# Altium PCB nrf52832_qfax_dcdc.PcbDoc
Units mm, origin at the board's own origin, x right, y up, seen from the top; angles counter-clockwise.
Board outline 76 x 76 mm, 2 copper layers (Top Layer, Bottom Layer), stack 1.671 mm thick; 50 components, 56 nets, 182 pads, 212 vias.
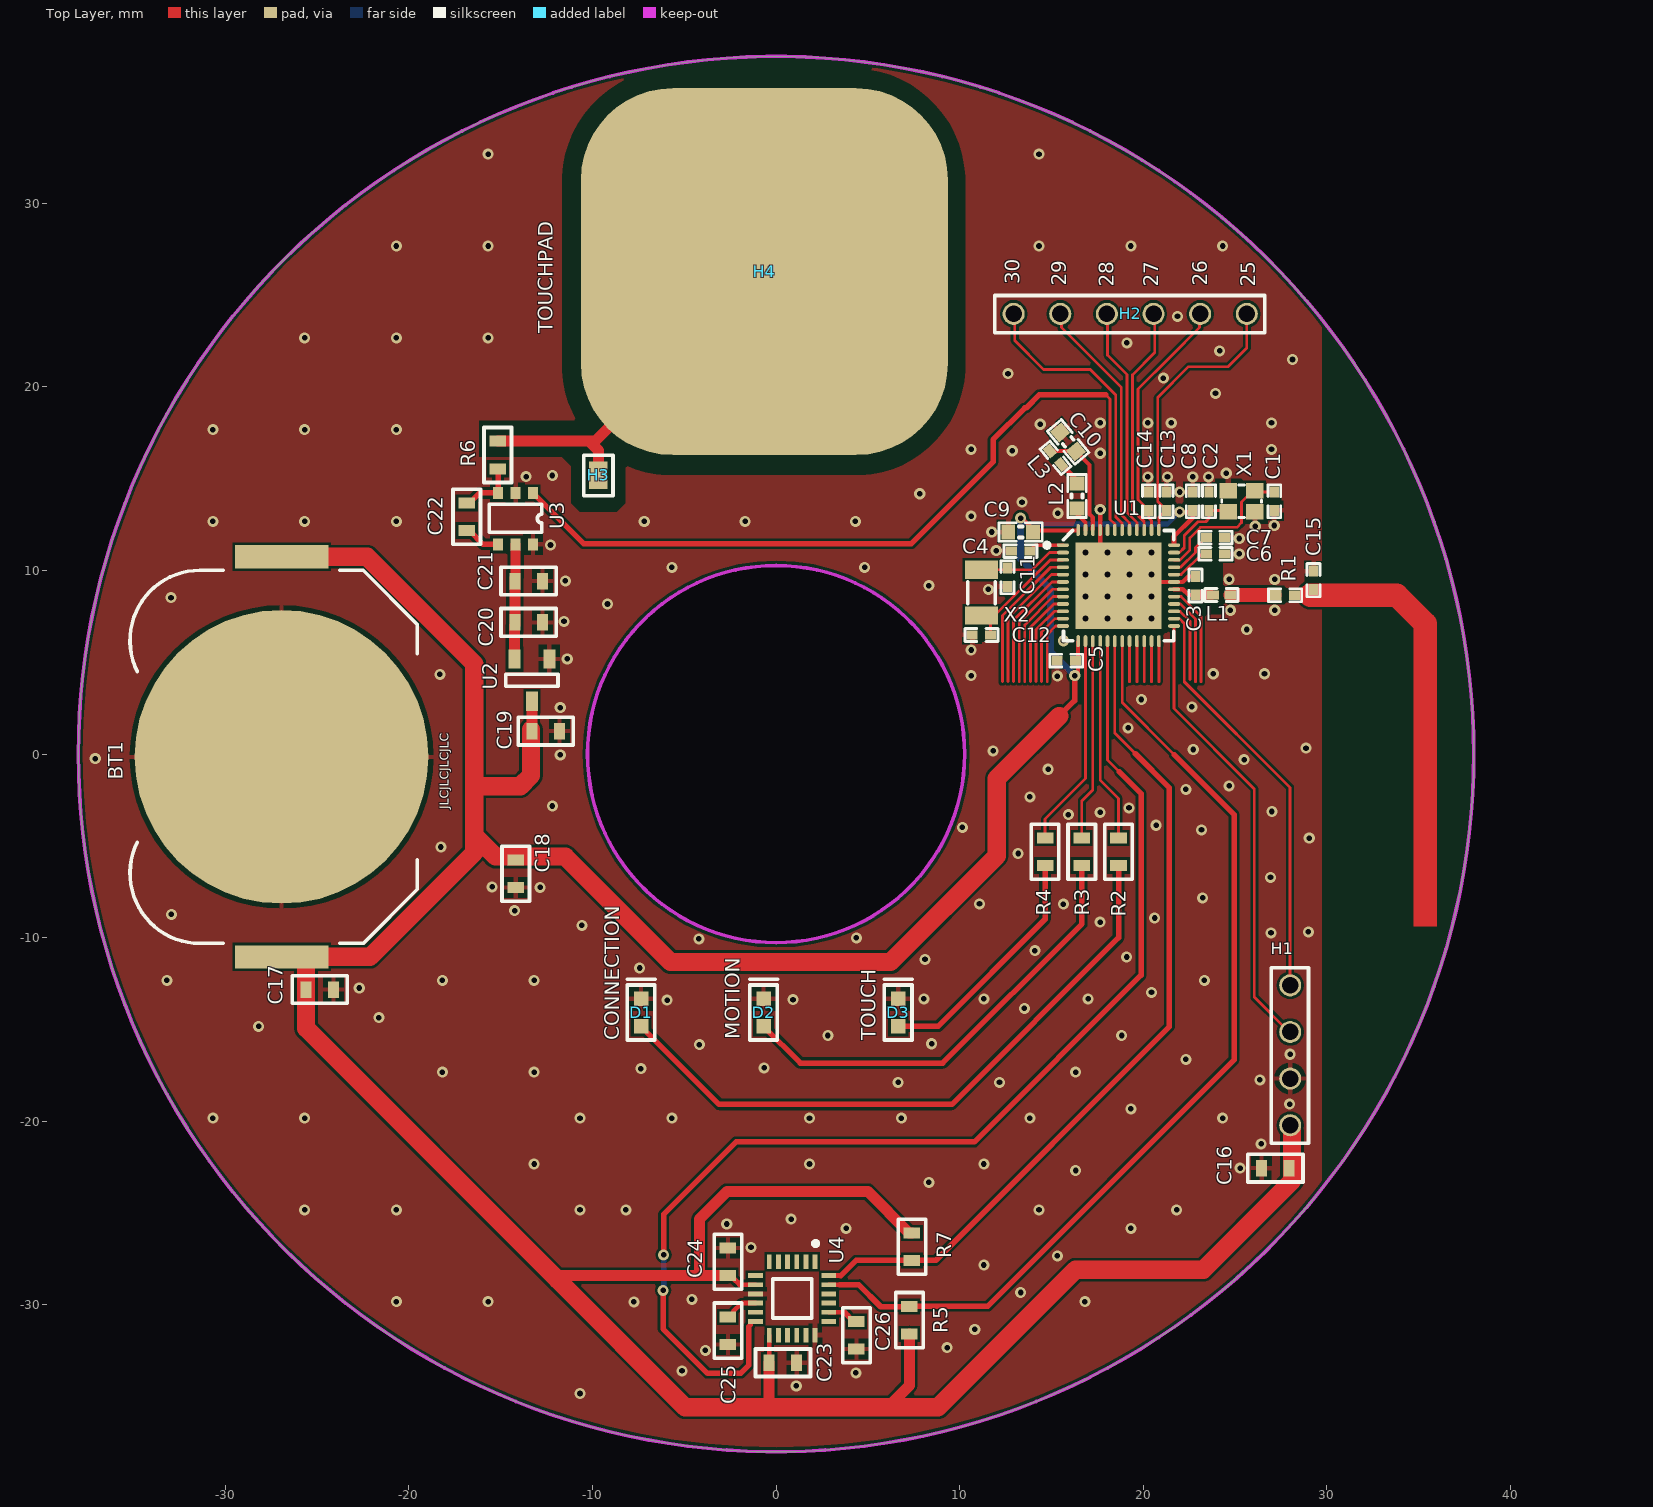
[diagram p0: Top Layer view]
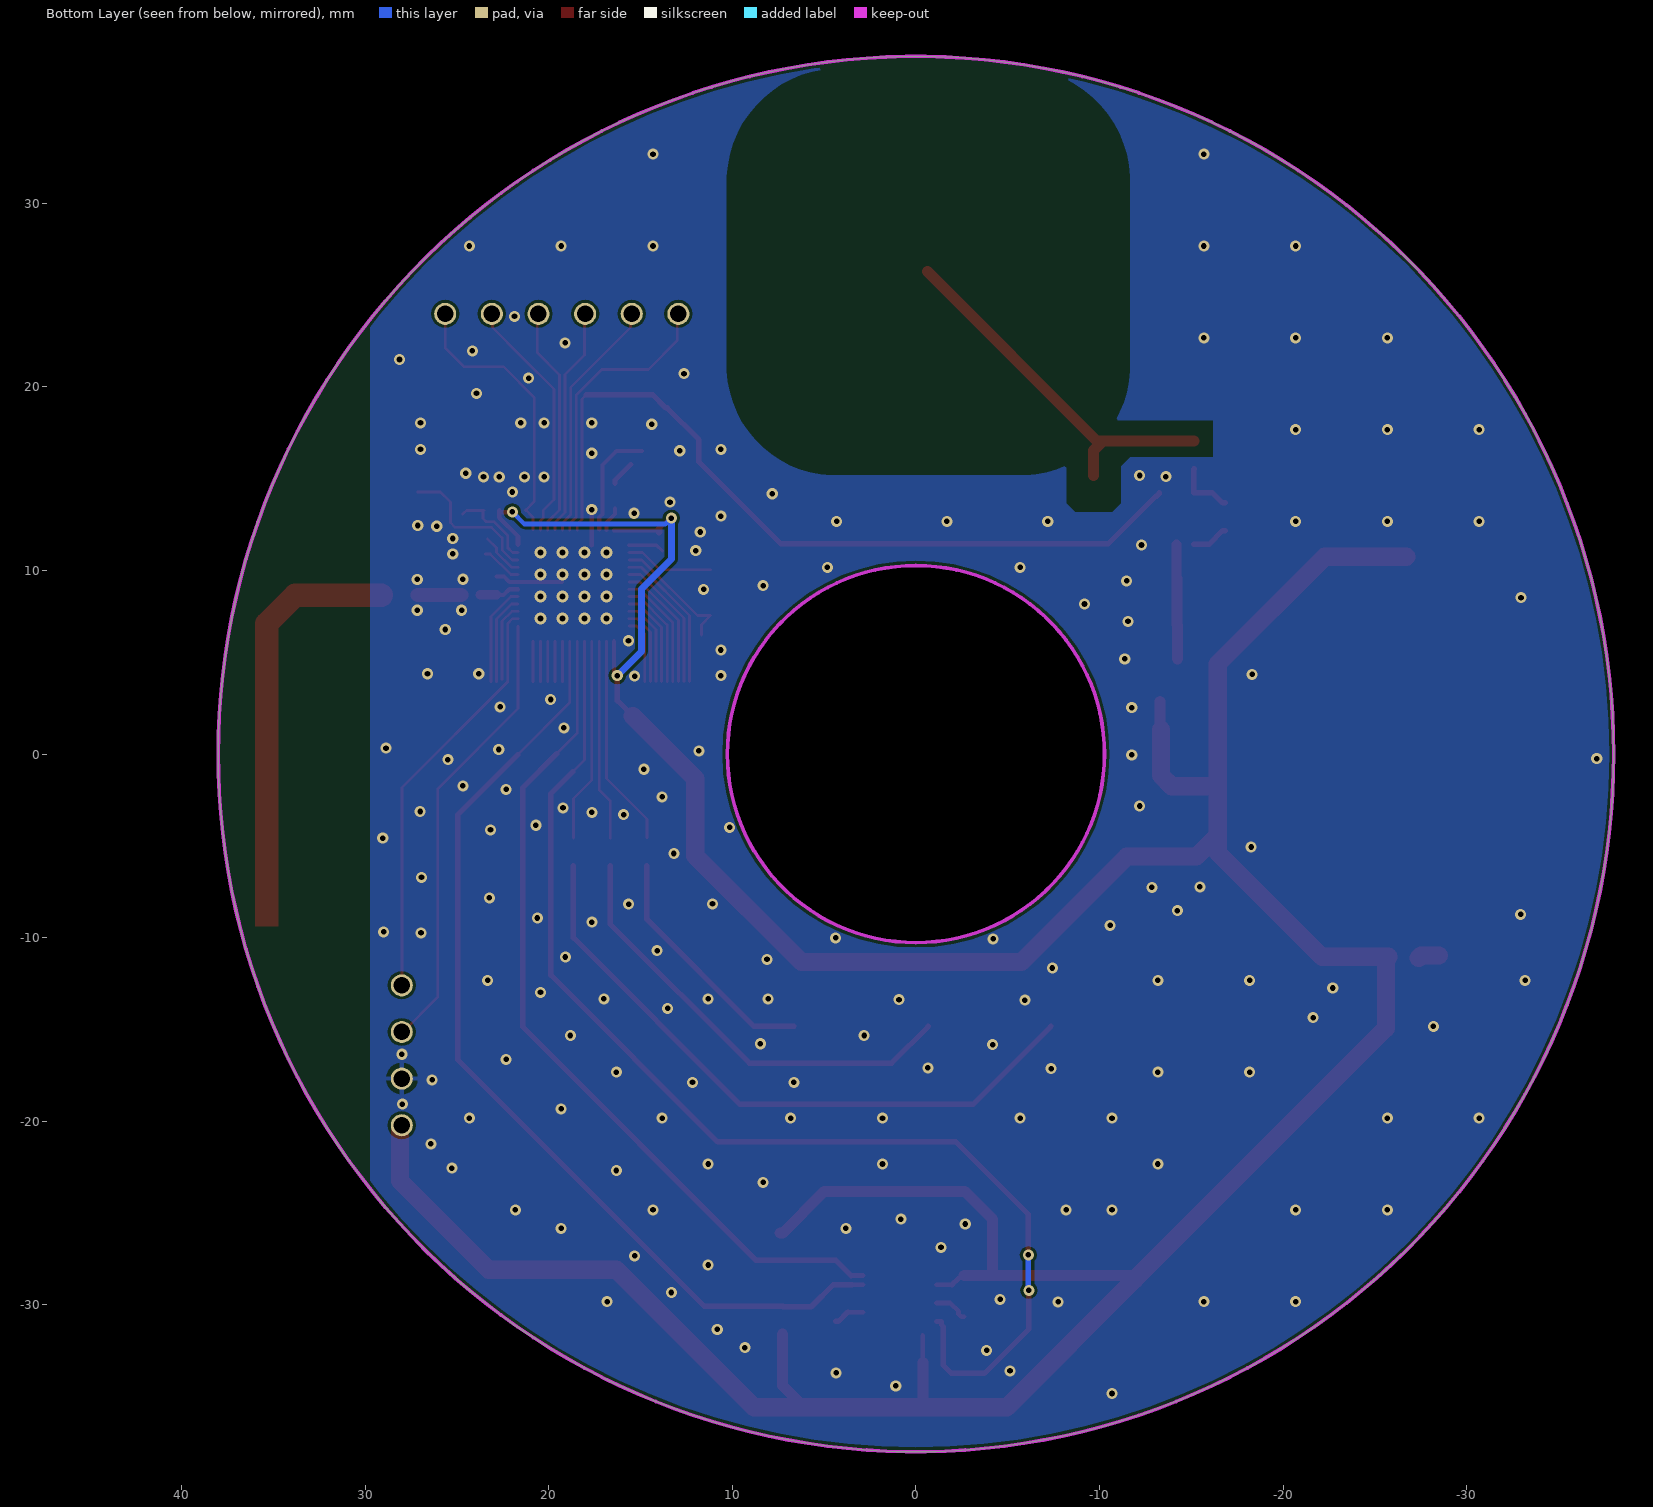
[diagram p1: Bottom Layer view, seen from below]
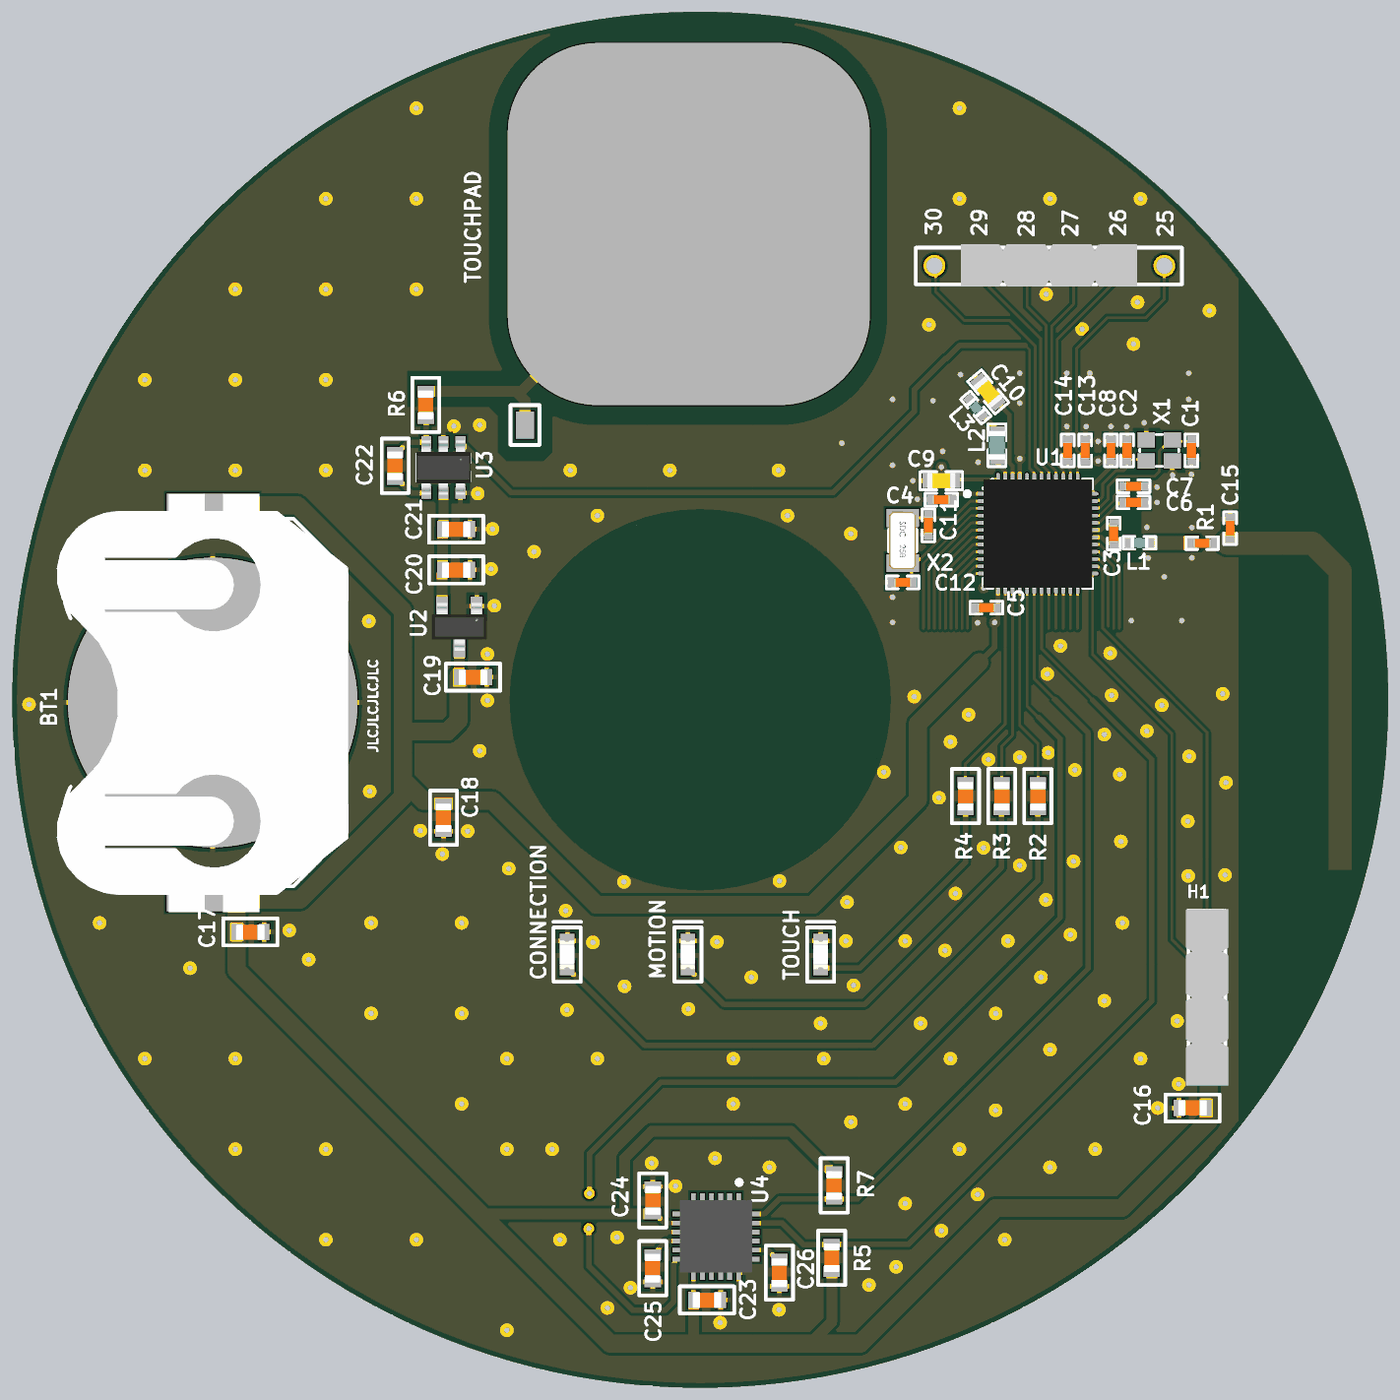
[diagram p2: 3D render of the assembled board from above, using the file's embedded part models]

## Layer stack, top to bottom
Top Solder: solder mask 0.0102, Solder Resist, Dk 3.5
Top Layer: signal copper 0.0356
Dielectric1: core 1.6002, FR-4, Dk 4.8
Bottom Layer: signal copper 0.0356
Bottom Solder: solder mask 0.0102, Solder Resist, Dk 3.5

## Board outline
0,-38 cw(c0,0) -38,0 cw(c0,0) 0,38 cw(c0,0) 38,0 cw(c0,0)
cut-out: 0,-10.269 cw(c0,0) -10.269,0 cw(c0,0) 0,10.269 cw(c0,0) 10.269,0 cw(c0,0)
cut-out: 0,-10.269 cw(c0,0) -10.269,0 cw(c0,0) 0,10.269 cw(c0,0) 10.269,0 cw(c0,0)

## Design rules (kind name [scope] priority, off if disabled: settings)
Clearance Clearance_1 [All] p1 off: gap=0.254 ignorepadtopadclearanceinfootprint=FALSE except(0: Arc-Hole Track-Hole SMDPad-Hole THPad-Hole Via-Hole Fill-Hole Poly-Hole Region-Hole Text-Hole)
Clearance Polygon_ANT [(InNamedPolygon('Top_Layer-GND')) or (InNamedPolygon('Bottom_Layer-GND')) vs InNet('RF')] p2: gap=0.127 ignorepadtopadclearanceinfootprint=FALSE except(0: Arc-Hole Track-Hole SMDPad-Hole THPad-Hole Via-Hole Fill-Hole Poly-Hole Region-Hole Text-Hole)
Clearance Polygon [(InNamedPolygon('Top_Layer-GND')) or (InNamedPolygon('Bottom_Layer-GND'))] p3: gap=0.254 ignorepadtopadclearanceinfootprint=FALSE except(0: Arc-Hole Track-Hole SMDPad-Hole THPad-Hole Via-Hole Fill-Hole Poly-Hole Region-Hole Text-Hole)
Clearance [All] p4: gap=0.152 ignorepadtopadclearanceinfootprint=FALSE except(0: Arc-Hole Track-Hole SMDPad-Hole THPad-Hole Via-Hole Fill-Hole Poly-Hole Region-Hole Text-Hole; 0.127: SMDPad-SMDPad)
ComponentClearance [All] p1 off: gap=0.254 collisioncheckmode=3 verticalgap=0.254 showdistances=FALSE
FabricationTestPointUsage TestPointUsage [All] p1: valid=0 allowmultiple=FALSE
FabricationTestpoint Testpoint [All] p1: side=3 testpointundercomponent=TRUE minsize=1.016 maxsize=2.54 preferedsize=1.524 minholesize=0 maxholesize=1.016 preferedholesize=0.813 testpointgrid=0.025 allowsidetop=TRUE allowsidebottom=TRUE usegrid=TRUE gridtolerance=0
Height [All] p1 off: minheight=0 maxheight=25.4 prefheight=12.7
HoleSize [All] p1: absolutevalues=TRUE maxlimit=4.064 minlimit=0.305 maxpercent=80.000 minpercent=20.000
MinimumAnnularRing [All] p1 off: minimumring=0.152
PolygonConnect PolygonConnect_1 [isVia and innet(gnd)] p1: connectstyle=Direct reliefconductorwidth=0.254 reliefentries=4 polygonreliefangle="90 Angle" airgapwidth=0.254
PolygonConnect [All] p2: connectstyle=Relief reliefconductorwidth=0.254 reliefentries=4 polygonreliefangle="90 Angle" airgapwidth=0.254
RoutingVias [All] p1: holewidth=0.406 width=0.813 viastyle="Through Hole" minholewidth=0.254 minwidth=0.254 maxholewidth=0.711 maxwidth=1.27
SilkToSolderMaskClearance SilkscreenOverComponentPads [IsPad] p1: minsilkscreentomaskgap=0.254 clearancetoexposedcopper=TRUE
SolderMaskExpansion [All] p1: expansion=0.076 istentingtop=FALSE
Width [All] p1: maxlimit=2.54 minlimit=0.152 preferedwidth=0.152
24 further rules are at their usual default settings.

## Classes and differential pairs
component class CurlingStoneSchematic: BT1 C16 C17 C18 C19 C20 C21 C22 C23 C24 C25 C26 D1 D2 D3 H1 H2 H3 H4 R2 R3 R4 R5 R6 R7 U2 U3 U4

## Components (designator, comment, footprint, x,y, rotation, side; value= is the part's Value field where it differs from the comment)
BT1 "Battery Holder" "Battery Holder" -26.93,-0.151 r90 top
C1 "12pF" CAPC1005X04L 27.133,13.773 r270 top
C2 "12pF" CAPC1005X04L 23.577,13.773 r90 top
C3 "0.8pF" CAPC1005X04L 22.841,9.175 r270 top
C4 "100nF" CAPC1005X04L 13.316,11.055 r180 top
C5 "100nF" CAPC1005X04L 15.805,5.086 r180 top
C6 "N.C." CAPC1005X04L 23.933,10.902 r180 top
C7 "100pF" CAPC1005X04L 23.933,11.791 r0 top
C8 "100nF" CAPC1005X04L 22.688,13.773 r90 top
C9 "4.7µF" CAPC1608X06L 13.316,12.096 r180 top
C10 "1.0µF" CAPC1608X06L 15.908,17.003 r310 top
C11 "12pF" CAPC1005X04L 12.605,9.632 r270 top
C12 "12pF" CAPC1005X04L 11.182,6.483 r180 top
C13 "12pF" CAPC1005X04L 21.266,13.773 r90 top
C14 "12pF" CAPC1005X04L 20.301,13.773 r90 top
C15 "0603 Capacitor" RF_0603 29.27,9.474 r270 top
C16 "0603 Capacitor" 0603 27.195,-22.551 r0 top
C17 "0603 Capacitor" 0603 -24.85,-12.825 r180 top
C18 "0603 Capacitor" 0603 -14.18,-6.515 r90 top
C19 "0603 Capacitor" 0603 -12.55,1.249 r180 top
C20 "0603 Capacitor" 0603 -13.48,7.175 r180 top
C21 "0603 Capacitor" 0603 -13.48,9.424 r180 top
C22 "0603 Capacitor" 0603 -16.85,12.925 r90 top
C23 "0603 Capacitor" 0603 0.375,-33.15 r180 top
C24 "0603 Capacitor" 0603 -2.625,-27.65 r270 top
C25 "0603 Capacitor" 0603 -2.625,-31.4 r90 top
C26 "0603 Capacitor" 0603 4.375,-31.65 r90 top
D1 "0603 LED" "0603 LED" -7.35,-14.076 r90 top
D2 "0603 LED" "0603 LED" -0.68,-14.076 r90 top
D3 "0603 LED" "0603 LED" 6.65,-14.076 r90 top
H1 "4x1 Header" "4x1 HEADER TH" 28,-20.215 r90 top
H2 "6x1 Header" "6x1 HEADER TH" 25.636,23.974 r180 top
H3 "Electrode" "ELECTRODE EXTERNAL" -9.68,15.174 r0 top
H4 "Electrode" "ELECTRODE INTERNAL" -0.635,26.277 r0 top
L1 "3.9nH" INDC1005X04L 24.263,8.667 r0 top
L2 "10µH" INDC1608X06L 16.389,14.057 r270 top
L3 "15nH" INDC1005X04L 15.222,16.14 r310 top
R1 "0603 Resistor" RF_0603 27.725,8.65 r0 top
R2 "0603 Resistor" 0603 18.649,-5.325 r270 top
R3 "0603 Resistor" 0603 16.65,-5.325 r270 top
R4 "0603 Resistor" 0603 14.65,-5.325 r270 top
R5 "0603 Resistor" 0603 7.261,-30.826 r270 top
R6 "0603 Resistor" 0603 -15.158,16.289 r90 top
R7 "0603 Resistor" 0603 7.4,-26.826 r90 top
U1 "nRF52832-QFAB" QFN40P600X600X90-48N 18.65,9.175 r0 top locked
U2 "MCP1700 1V8" "MCP1700 SOT-23" -12.35,5.175 r270 top
U3 "Capacative Touch" "CAPACATIVE TOUCH" -13.24,14.225 r270 top
U4 "MPU-6050" MPU-6050 2.125,-27.65 r270 top
X1 "32MHz" BT-XTAL_2016 25.355,13.773 r180 top
X2 "32.768kHz" XTAL_3215 11.182,8.794 r270 top

## Footprints (in the part's own frame and the unit in brackets; to place one, negate y for a bottom-side part, rotate by r counter-clockwise, add the part's x,y. Pads: shape width x height; smd on the part's side, far side on the other; paste and mask are expansions set on the pad)
"4x1 HEADER TH" [mm]
  round 1.2 hole 0.9: 1(0,0) 2(2.54,0) 3(5.08,0) 4(7.62,0)
  silkscreen extent -0.97,-1 8.57,1.02, body extent -1.1,-1.17 8.65,1.17, height 10.38
"6x1 HEADER TH" [mm]
  round 1.2 hole 0.9: 1(0,0) 2(2.54,0) 3(5.08,0) 4(7.62,0) 5(10.16,0) 6(12.7,0)
  silkscreen extent -0.97,-1 13.72,1.02, body extent 1.5,-1.19 11.25,1.14, height 10.38
0603 [mm]
  rect 0.6x0.9 smd: 1(-0.75,0) 2(0.75,0)
  silkscreen extent -1.5,-0.75 1.5,0.75, body extent -0.8,-0.42 0.8,0.45, height 0.81
"0603 LED" [mm]
  rect 0.8x0.8 smd: 1(-0.75,0) 2(0.75,0)
  silkscreen extent -1.5,-0.76 1.8,0.76, body extent -0.8,-0.4 0.8,0.4, height 0.56
"Battery Holder" [mm]
  rect 1.27x5.08 smd: 1(-10.897,0) 1(10.897,0)
  round 16 smd: 2(0,0)
  silkscreen extent -10.16,-7.39 10.16,8.25, body extent -11.57,-7.47 11.53,8.62, height 4.1
BT-XTAL_2016 [mm] "Crystal 2.0 x 1.6 mm"
  rect 0.95x0.85 smd: 1(-0.725,-0.575) 2(0.725,-0.575) 3(0.725,0.575) 4(-0.725,0.575)
  silkscreen extent -1.08,-0.88 1.08,0.88
"CAPACATIVE TOUCH" [mm]
  rect 0.65x0.55 smd: 1(0,0) 2(0,-0.95) 3(0,-1.9) 4(2.8,-1.9) 5(2.8,-0.95) 6(2.8,0)
  silkscreen extent 0.63,-2.38 2.15,0.48, body extent -0.1,-2.45 2.9,0.55, height 1.48
CAPC1005X04L [mm] "Chip Capacitor, 2-Leads, Body 1.0x0.5mm, IPC High Density"
  rect 0.6x0.5 smd: 1(-0.5,0) 2(0.5,0)
  silkscreen extent -0.9,-0.35 0.9,0.35, body extent -0.51,-0.25 0.51,0.25, height 0.5
CAPC1608X06L [mm] "Chip Capacitor, 2-Leads, Body 1.6x0.8mm, IPC High Density"
  rect 0.75x0.8 smd: 1(-0.675,0) 2(0.675,0)
  silkscreen extent -1.17,-0.5 1.17,0.5, body extent -0.8,-0.43 0.8,0.43, height 0.8
"ELECTRODE EXTERNAL" [mm]
  rect 1x1.5 smd: 1(0,0)
  silkscreen extent -0.8,-1.1 0.8,1.1
"ELECTRODE INTERNAL" [mm]
  rrect50% 20x20 smd: 1(0,0)
INDC1005X04L [mm] "Chip Inductor, 2-Leads, Body 1.0x0.5mm, IPC High Density"
  rect 0.65x0.5 smd: 1(-0.475,0) 2(0.475,0)
  silkscreen extent -0.9,-0.35 0.9,0.35, body extent -0.5,-0.3 0.5,0.3, height 0.5
INDC1608X06L [mm] "Chip Inductor, 2-Leads, Body 1.6x0.8mm, IPC High Density"
  rect 0.75x0.8 smd: 1(-0.675,0) 2(0.675,0)
  silkscreen extent -1.18,-0.5 1.17,0.5, body extent -0.8,-0.48 0.8,0.48, height 0.8
"MCP1700 SOT-23" [mm]
  rect 1.05x0.65 smd: 1(0,0) 2(0,-1.9) 3(2.3,-0.95)
  silkscreen extent 0.82,-2.38 1.48,0.48, body extent -0.17,-2.47 2.47,0.57, height 1.12
MPU-6050 [mm]
  rect 0.8x0.26 smd: 1(0,0) 2(0,-0.5) 3(0,-1) 4(0,-1.5) 5(0,-2) 6(0,-2.5) 13(4,-2.5) 14(4,-2) 15(4,-1.5) 16(4,-1) 17(4,-0.5) 18(4,0)
  rect 0.26x0.8 smd: 7(0.75,-3.25) 8(1.25,-3.25) 9(1.75,-3.25) 10(2.25,-3.25) 11(2.75,-3.25) 12(3.25,-3.25) 19(3.25,0.75) 20(2.75,0.75) 21(2.25,0.75) 22(1.75,0.75) 23(1.25,0.75) 24(0.75,0.75)
  silkscreen extent -1.14,-2.31 3.06,0.18, body extent 0,-3.25 4,0.75, height 0.94
QFN40P600X600X90-48N [mm] "QFN, 48-Leads, Body 6,0x6,0mm (max), Pitch 0,40mm, IPC Medium Density"
  oval 0.65x0.2 smd: 1(-3.025,2.2) 2(-3.025,1.8) 3(-3.025,1.4) 4(-3.025,1) 5(-3.025,0.6) 6(-3.025,0.2) 7(-3.025,-0.2) 8(-3.025,-0.6) 9(-3.025,-1) 10(-3.025,-1.4) 11(-3.025,-1.8) 12(-3.025,-2.2) 25(3.025,-2.2) 26(3.025,-1.8) 27(3.025,-1.4) 28(3.025,-1) 29(3.025,-0.6) 30(3.025,-0.2) 31(3.025,0.2) 32(3.025,0.6) 33(3.025,1) 34(3.025,1.4) 35(3.025,1.8) 36(3.025,2.2)
  oval 0.2x0.65 smd: 13(-2.2,-3.025) 14(-1.8,-3.025) 15(-1.4,-3.025) 16(-1,-3.025) 17(-0.6,-3.025) 18(-0.2,-3.025) 19(0.2,-3.025) 20(0.6,-3.025) 21(1,-3.025) 22(1.4,-3.025) 23(1.8,-3.025) 24(2.2,-3.025) 37(2.2,3.025) 38(1.8,3.025) 39(1.4,3.025) 40(1,3.025) 41(0.6,3.025) 42(0.2,3.025) 43(-0.2,3.025) 44(-0.6,3.025) 45(-1,3.025) 46(-1.4,3.025) 47(-1.8,3.025) 48(-2.2,3.025)
  rect 4.7x4.7 smd: 49(0,0)
  silkscreen extent -4.02,-3 3,3, body extent -3.02,-3.02 3.02,3.02, height 0.86
RF_0603 [mm]
  rect 0.6x0.5 smd: 1(-0.5,0) 2(0.5,0)
  silkscreen extent -0.9,-0.35 0.9,0.35, body extent -0.51,-0.25 0.51,0.25, height 0.5
XTAL_3215 [mm] "XTAL SMD 3.2 x 1.5 mm"
  rect 1x1.8 smd: 1(-1.25,0) 2(1.25,0)
  silkscreen extent -0.6,-0.75 0.6,0.75, body extent -1.6,-0.75 1.6,0.75, height 0.81

## Part data
BT1: "Battery Holder 1-Cell 20mm Size Tin Nickel SMT Mount T/R", Case/Package=SMD/SMT, Manufacturer 1="Keystone Electronics", Manufacturer Part Number 1=3034TR, Package Quantity=500, Supplier Part Number 1=36-3034CT-ND, Category=Uncategorized, ComponentLink1Description=https://datasheet.ciiva.com/29204/3034tr-29204080.pdf?src-supplier=Digi-Key, ComponentLink1URL=https://datasheet.ciiva.com/29204/3034tr-29204080.pdf?src-supplier=Digi-Key, ComponentLink2Description=https://datasheet.ciiva.com/41797/3034-41797079.pdf?src-supplier=Digi-Key, ComponentLink2URL=https://datasheet.ciiva.com/41797/3034-41797079.pdf?src-supplier=Digi-Key, Contact Plating=Tin, Lead Free="Lead Free", Material=Bronze, Mount="Surface Mount,PCB", Number of Batteries=1, Number of Cells=1, Packaging="Tape and Reel", Pricing 1="1=0.42000, 25=0.37760, 100=0.28630, 250=0.25592 (USD)", RoHS=Yes, Stock 1=74655, Supplier 1=Digi-Key, Termination=SMD/SMT
C1 C2 C11 C12 C13 C14: library part C0402-12p, "Capacitor, NP0, ±2%", Artikkelnr Noca=20029159, Artikkelnr Simpro=N.A., Footprint Doc=0402, LatestRevisionDate=2011-05-11, Note=50V, Part Number=C0402-12p, Pin Count=2, Published=2009-05-08, Publisher="Nordic Semiconductor"
C3: library part C0402-0.8p, "Capacitor, NP0, ±5%", Artikkelnr Noca=20029147, Artikkelnr Simpro=N.A., Footprint Doc=0402, LatestRevisionDate=2012-11-21, Note=50V, Part Number=C0402-0.8p, Pin Count=2, Published=2009-05-08, Publisher="Nordic Semiconductor"
C4 C5 C8: library part C0402-100n, "Capacitor, X7R, ±10%", Artikkelnr Noca=20039200, Artikkelnr Simpro=N.A., Footprint Doc=0402, LatestRevisionDate=2009-11-23, Note=16V, Part Number=C0402-100n, Pin Count=2, Published=2009-05-08, Publisher="Nordic Semiconductor"
C6: library part C0402-N.C., "Not mounted", Artikkelnr Noca=N.A., Artikkelnr Simpro=N.A., Footprint Doc=0402, LatestRevisionDate=2009-05-08, Note="Chip Cap", Part Number=C0402-N.C., Pin Count=2, Published=2009-05-08, Publisher="Nordic Semiconductor"
C7: library part C0402-100p, "Capacitor, NP0, ±5%", Artikkelnr Noca=20029135, Artikkelnr Simpro=N.A., Footprint Doc=0402, LatestRevisionDate=2009-05-08, Note=50V, Part Number=C0402-100p, Pin Count=2, Published=2009-05-08, Publisher="Nordic Semiconductor"
C9: library part C0603-4µ7, "Capacitor, X5R, ±10%", Artikkelnr Noca=20069060, Artikkelnr Simpro=N.A., Footprint Doc=0603, LatestRevisionDate=2009-11-23, Note=6.3V, Part Number=C0603-4µ7, Pin Count=2, Published=2009-05-08, Publisher="Nordic Semiconductor"
C10: library part C0603-1µ0, "Capacitor, X7R, ±10%", Artikkelnr Noca=20039335, Artikkelnr Simpro=N.A., Footprint Doc=0603, LatestRevisionDate=2013-06-05, Note=16V, Part Number=C0603-1µ0, Pin Count=2, Published=2009-05-08, Publisher="Nordic Semiconductor"
D1 D2 D3: "LED Uni-Color Green 574nm 2-Pin Chip LED T/R", Case Code (Imperial)=0603, Case Code (Metric)=1608, Color=Green, Forward Current=30mA, Forward Voltage=2V, Lens Color=Colorless, Manufacturer 1="Vishay Lite-On", Manufacturer Part Number 1=LTST-C191KGKT, Max Operating Temperature=85°C, Max Power Dissipation=75mW, Min Operating Temperature=-55°C, Package Quantity=1, Reverse Voltage=5V, Supplier Part Number 1=160-1446-1-ND, Test Current=20mA, Case/Package=0603, Category=LEDs, ComponentLink1Description=https://datasheet.ciiva.com/2109/ltst-c191kgkt-2109973.pdf?src-supplier=Digi-Key, ComponentLink1URL=https://datasheet.ciiva.com/2109/ltst-c191kgkt-2109973.pdf?src-supplier=Digi-Key, Depth=0.8mm, Dominant Wavelength=571nm, Height=0.55mm, Illumination Color=Green, Lead Free="Lead Free", Length=1.6mm, Lens Style=Rectangular,Colorless, Lens Transparency=Clear, Luminous Intensity=35mcd, Mount="Surface Mount", Number of Elements=1, Number of LEDs=1, Number of Pins=2, Packaging="Tape and Reel", Power Dissipation=75mW, Power Rating=75mW, Pricing 1="1=0.26000, 10=0.14100, 100=0.06560, 500=0.06060, 1000=0.04747, 2000=0.04646 (USD)", Radiation Hardening=No, RoHS=Yes, RoHS Compliant=Yes, Supplier 1=Digi-Key, Viewing Angle=130°, Wavelength=574nm, Width=0.8mm
L1: library part L0402-3n9, "High frequency chip inductor ±5%", Manufacturer=Murata, Manufacturer Part Number=LQP15MN3N9B02D, Supplier part number=490-1131-1-ND, Artikkelnr Noca=33029151, Artikkelnr Simpro=N.A., Datasheet=http://search.murata.co.jp/Ceramy/image/img/PDF/ENG/L0075S0084LQP15M.pdf, Footprint Doc=0402, LatestRevisionDate=2012-09-19, Note="High frequency chip inductor ±5%", Part Number=L0402-3n9, Pin Count=2, Published=2009-05-08, Publisher="Nordic Semiconductor", Supplier=Digi-Key
L2: library part L0603-10µ, "Chip inductor, IDC,min = 50 mA, ±20%", 2nd source part number=178-6105, Manufacturer="Taiyo Yuden", Manufacturer Part Number=LBMF1608T100K, Supplier part number=587-1714-1-ND, 2nd source Supplier=Farnell, Artikkelnr Noca=33029314, Artikkelnr Simpro=N.A., Datasheet=http://www.yuden.co.jp/ut/product/pdf/elb2_e.pdf, Footprint Doc=0603, LatestRevisionDate=2012-09-19, Note="LBMF1608T100K 10µH 80mA 0603", Part Number=L0603-10µ, Pin Count=2, Published=2010-02-24, Publisher="Nordic Semiconductor", Supplier=Digi-Key
L3: library part L0402-15n, "High frequency chip inductor ±10%", 2nd source part number=658-1328, Manufacturer="Taiyo Yuden", Manufacturer Part Number=HK100515NJ-T, Supplier part number=587-1521-1-ND, 2nd source Supplier=Farnell, Artikkelnr Noca=33029323, Artikkelnr Simpro=N.A., Datasheet=http://www.yuden.co.jp/productdata/catalog/en/mlci04_e.pdf, Footprint Doc=0402, LatestRevisionDate=2012-09-19, Note="High frequency chip inductor ±10%", Part Number=L0402-15n, Pin Count=2, Published=2010-07-12, Publisher="Nordic Semiconductor", Supplier=Digi-Key
U1: "Multi-protocol Bluetooth Low Energy, ANT and 2.4GHz proprietary system-on-chip", Manufacturer="Nordic Semiconductor", Artikkelnr Noca=N.A., Artikkelnr Simpro=N.A., Footprint Doc=QFN-48, LatestRevisionDate=2016-11-24, Manufacturer Part Number=nRF52832-QFAB, Part Number=nRF52832-QFAB, Pin Count=48, Published=2016-11-24, Publisher="Nordic Semiconductor", Supplier="Nordic Semiconductor"
U2: "V REG, LDO 250MA, SMD, SOT-23-3; Output Voltage:1.8V; Dropout voltage:0.178V; No. of Pins:3; Voltage Regulator IC Case Style:SOT-23; Operating Temperature Range:-40°C to +125°C; Case Style:SOT-23; Max Operating Temperature:125°C; Min;RoHS Compliant: Yes", Case/Package=SOT-23, Dropout Voltage=150mV, Input Bias Current=1.6uA, Manufacturer 1=Microchip, Manufacturer Part Number 1=MCP1700T-1802E/TT, Max Input Voltage=6V, Max Operating Temperature=125°C, Max Output Current=250mA, Max Output Voltage=1.8V, Max Power Dissipation=369.6mW, Min Input Voltage=2.3V, Min Operating Temperature=-40°C, Nominal Supply Current=4uA, Output Voltage Accuracy=2%, Package Quantity=3000, Supplier Part Number 1=MCP1700T1802ETTCT-ND, Accuracy=2%, Category="Voltage Regulators - Linear", ComponentLink1Description=https://datasheet.ciiva.com/14150/mcp1700-eng-tds-14150117.pdf?src-supplier=Distrelec, ComponentLink1URL=https://datasheet.ciiva.com/14150/mcp1700-eng-tds-14150117.pdf?src-supplier=Distrelec, ComponentLink2Description=https://datasheet.ciiva.com/17364/jp011779-17364282.pdf?src-supplier=Avnet+Europe, ComponentLink2URL=https://datasheet.ciiva.com/17364/jp011779-17364282.pdf?src-supplier=Avnet+Europe, ComponentLink3Description=https://datasheet.ciiva.com/2040/21826b-2040109.pdf?src-supplier=Digi-Key, ComponentLink3URL=https://datasheet.ciiva.com/2040/21826b-2040109.pdf?src-supplier=Digi-Key, ComponentLink4Description=https://datasheet.ciiva.com/8041/21826b-8041597.pdf?src-supplier=Element14, ComponentLink4URL=https://datasheet.ciiva.com/8041/21826b-8041597.pdf?src-supplier=Element14, ComponentLink5Description=https://datasheet.ciiva.com/2040/21826b-2040110.pdf?src-supplier=Digi-Key, ComponentLink5URL=https://datasheet.ciiva.com/2040/21826b-2040110.pdf?src-supplier=Digi-Key, ComponentLink6Description=https://datasheet.ciiva.com/8237/jp011779-8237326.pdf?src-supplier=Avnet, ComponentLink6URL=https://datasheet.ciiva.com/8237/jp011779-8237326.pdf?src-supplier=Avnet, ComponentLink7Description=https://datasheet.ciiva.com/16218/filehandler-aspxddocname-en011779-16218350.pdf?src-supplier=Future+Electronics, ComponentLink7URL=https://datasheet.ciiva.com/16218/filehandler-aspxddocname-en011779-16218350.pdf?src-supplier=Future+Electronics, Height=0.95mm, Lead Free="Lead Free", Length=2.9mm, Max Supply Voltage=6V, Min Output Voltage=1.8V, Min Supply Voltage=2.3V, Mount="Surface Mount", Nominal Output Voltage=1.8V, Number of Outputs=1, Number of Pins=3, Output Current=250mA, Output Type=Fixed, Output Voltage=1.8V, Packaging="Tape and Reel", Polarity=Positive, Power Dissipation=369.6mW, Pricing 1="1=0.39000, 25=0.33000, 100=0.29000 (USD)", Quiescent Current=4uA, Radiation Hardening=No, REACH SVHC="No SVHC", RoHS=Yes, RoHS Compliant=Yes, Stock 1=24907, Supplier 1=Digi-Key, Supply Current=4uA, Termination=SMD/SMT, Width=1.3mm
U3: "Capacitive Touch Screen 1Keys 6-Pin SOT-23 Tape and Reel", Case/Package=SOT-23-6, Load Capacitance=50pF, Manufacturer 1="Microchip / Atmel", Manufacturer Part Number 1=AT42QT1011-TSHR, Max Operating Temperature=85°C, Max Supply Voltage=5.5V, Min Operating Temperature=-40°C, Min Supply Voltage=1.8V, Nominal Supply Current=729uA, Operating Supply Current=378.5uA, Package Quantity=4500, Supplier Part Number 1=AT42QT1011-TSHRCT-ND, Category=Uncategorized, ComponentLink1Description=https://datasheet.ciiva.com/1165/731627-1165685.pdf?src-supplier=Element14, ComponentLink1URL=https://datasheet.ciiva.com/1165/731627-1165685.pdf?src-supplier=Element14, ComponentLink2Description=https://datasheet.ciiva.com/14094/at42qt1011-eng-tds-14094872.pdf?src-supplier=Distrelec, ComponentLink2URL=https://datasheet.ciiva.com/14094/at42qt1011-eng-tds-14094872.pdf?src-supplier=Distrelec, ComponentLink3Description=https://datasheet.ciiva.com/1403/doc8287-1403456.pdf?src-supplier=Digi-Key, ComponentLink3URL=https://datasheet.ciiva.com/1403/doc8287-1403456.pdf?src-supplier=Digi-Key, ComponentLink4Description=https://datasheet.ciiva.com/1403/doc8287-1403457.pdf?src-supplier=Digi-Key, ComponentLink4URL=https://datasheet.ciiva.com/1403/doc8287-1403457.pdf?src-supplier=Digi-Key, ComponentLink5Description=https://datasheet.ciiva.com/1403/doc8287-1403458.pdf?src-supplier=Digi-Key, ComponentLink5URL=https://datasheet.ciiva.com/1403/doc8287-1403458.pdf?src-supplier=Digi-Key, ComponentLink6Description=https://datasheet.ciiva.com/15222/getdatasheetpartid-463081-15222284.pdf?src-supplier=Verical, ComponentLink6URL=https://datasheet.ciiva.com/15222/getdatasheetpartid-463081-15222284.pdf?src-supplier=Verical, Height=1.3mm, Lead Free="Lead Free", Length=3mm, Mount="Surface Mount", Number of Channels=1, Number of Inputs=1, Number of Pins=6, Packaging="Tape and Reel", Pricing 1="1=0.61000, 25=0.56000, 100=0.50000 (USD)", REACH SVHC="No SVHC", Resolution=14b, RoHS=Yes, RoHS Compliant=Yes, Series=QTouch™, Supplier 1=Digi-Key, Supply Current=729uA, Touchscreen=Capacitive, Width=1.75mm
U4: "INVENSENSE   MPU-6050   GYRO / ACCEL, 6-AXIS, I2C, QFN-24", Case/Package=QFN, Manufacturer 1="TDK InvenSense", Max Operating Temperature=85°C, Min Operating Temperature=-40°C, Supplier Part Number 1=1428-1007-1-ND, Category="Inertial Measurement Units (IMUs)", ComponentLink1Description=https://datasheet.ciiva.com/1513/1788002-1513632.pdf?src-supplier=Element14, ComponentLink1URL=https://datasheet.ciiva.com/1513/1788002-1513632.pdf?src-supplier=Element14, ComponentLink2Description=https://datasheet.ciiva.com/22731/1788002-22731434.pdf?src-supplier=Element14, ComponentLink2URL=https://datasheet.ciiva.com/22731/1788002-22731434.pdf?src-supplier=Element14, Manufacturer Part Number 1=MPU-6050, Mount="Surface Mount", Output Type=I2C, Packaging="Tape and Reel", Pricing 1="1=7.55000, 5=6.62400, 10=5.96200, 25=5.30000, 50=4.90240, 100=4.24000, 500=3.97500, 1000=3.71000 (USD)", RoHS=Yes, RoHS Compliant=Yes, Sensor Type="Accelerometer,Gyroscope,3 Axis", Series=-, Stock 1=3318, Supplier 1=Digi-Key
X1: library part XTAL_SMD2016_32MHz_8pF_General, "XTAL SMD 2016, 32MHz, Cl=8pF, Total Tol: ±40ppm", Artikkelnr Noca=N.A., Artikkelnr Simpro=N.A., Footprint Doc=XTAL_2016, LatestRevisionDate=2016-08-19, Note="XTAL SMD 32.000MHz", Part Number=XTAL_SMD2016_32MHz_8pF_General, Pin Count=4, Published=2016-08-19, Publisher="Nordic Semiconductor"
X2: library part XTAL_SMD3215_32.768kHz_9pF_General, "XTAL SMD 3215, 32.768kHz, Cl=9pF, Total Tol: ±50ppm", Artikkelnr Noca=N.A., Artikkelnr Simpro=N.A., Footprint Doc=XTAL_3215, LatestRevisionDate=2016-08-19, Note="XTAL SMD 32.768kHz", Part Number=XTAL_SMD3215_32.768kHz_9pF_General, Pin Count=2, Published=2016-08-19, Publisher="Nordic Semiconductor"

## Free pads (board coordinates)
  rect 0.762x0.762 smd: 0(27.159,8.673)

## Via types
v1: diameter 0.6, hole 0.305, Top Layer to Bottom Layer, 155 vias
v2: diameter 0.61, hole 0.305, Top Layer to Bottom Layer, tented both sides, 41 vias
v3: diameter 0.66, hole 0.33, Top Layer to Bottom Layer, tented both sides, 16 vias

## Nets (pads, with @x,y where several pads share a name; then routed paths per layer and width w, separated by ;. In a path a pad name is that pad's centre, name@x,y a point inside that pad or via, vN(x,y) a via of type N, cw(c..) or ccw(c..) an arc to the next point about the centre after c; other vN are vias at no path point)
1V8: C20.2 C21.2 U2.2 U3.5 | length 6.3
  Top Layer w0.55: C21.2 -14.23,9.574 -14.19,9.614 U3.5
  Top Layer w0.6: U2.2 -14.25,7.005 -14.23,7.025 C20.2 C21.2@-14.23,9.487
ANT: C15.2 R1.2 | length 22.7
  Top Layer w1.27: 29.106,8.655 33.795,8.655 35.355,7.095 35.355,-8.746
"CHARGE PUMP": C26.2 U4.20 | length 1.7
  Top Layer w0.26: U4.20 3.725,-30.4
  Top Layer w0.3: 3.725,-30.4 3.901,-30.576 4.225,-30.9 C26.2
DEC1: C4.1 U1.1 | length 1.9
  Top Layer w0.203: C4.1@13.82,11.074 14.121,11.375 U1.1
DEC2: C6.2 U1.32 | length 2.2
  Top Layer w0.152: U1.32 22.061,9.775 23.188,10.902 C6.2@23.451,10.902
DEC3: C7.1 U1.33 | length 2.4
  Top Layer w0.152: U1.33 22.03,10.175 22.841,10.986 22.841,11.237 C7.1@23.325,11.721
DEC4: C10.2 L3.1 U1.46 | length 6
  Top Layer w0.229: L3.1 C10.2@16.324,16.504 ; C10.2 17.075,15.752 17.075,13.066 17.25,12.892 U1.46@17.25,12.231
GND: BT1.2 C1.2 C2.2 C3.1 C4.2 C5.2 C6.1 C7.2 C8.2 C9.2 C10.1 C11.2 C12.2 C13.2 C14.2 C15.1 C16.1 C17.1 C18.1 C19.1 C20.1 C21.1 C23.1 C24.1 C25.1 C26.1 D1.2 D2.2 D3.2 H1.2 U1.31 U1.45 U1.49 U2.1 U3.2 U3.6 U4.9 U4.18 X1.2 X1.4 | length 5.6
  Top Layer w0.229: U1.49@17.65,11.375 U1.45 v2@17.65,13.315 ; U1.49@19.268,9.378 22.149,9.378 22.436,9.665 C3.1@22.849,9.665
  other v1: -10.68,-34.826 1.098,-34.407 4.349,-33.696 -5.125,-33.595 -3.855,-32.477 9.32,-32.326 10.82,-31.326 -20.68,-29.826 -15.68,-29.826 -7.75,-29.829 16.82,-29.826 -4.592,-29.697 13.32,-29.326 11.32,-27.826 15.32,-27.326 -1.366,-26.863 3.82,-25.826 19.32,-25.826 -2.687,-25.593 0.82,-25.326 -25.68,-24.826 -20.68,-24.826 -10.68,-24.826 -8.18,-24.826 14.32,-24.826 21.82,-24.826 8.32,-23.326 16.32,-22.678 25.27,-22.551 -13.18,-22.326 1.82,-22.326 11.32,-22.326 26.42,-21.226 -30.68,-19.826 -25.68,-19.826 -10.68,-19.826 -5.68,-19.826 1.82,-19.826 6.82,-19.826 13.82,-19.826 24.32,-19.826 19.32,-19.326 27.971,-19.065 6.645,-17.876 12.17,-17.876 26.346,-17.745 -18.18,-17.326 -13.18,-17.326 16.32,-17.326 -7.36,-17.135 -0.655,-17.084 22.32,-16.63 27.997,-16.348 -4.18,-15.826 8.47,-15.776 2.82,-15.326 18.82,-15.326 -28.18,-14.826 -21.63,-14.351 13.52,-13.851 -5.93,-13.401 0.92,-13.376 8.045,-13.326 11.32,-13.326 16.995,-13.326 20.445,-12.976 -22.702,-12.741 -33.18,-12.326 -18.18,-12.326 -13.18,-12.326 23.32,-12.326 -7.43,-11.651 8.108,-11.18 19.095,-11.051 14.095,-10.701 -4.211,-10.062 4.375,-10.012 26.955,-9.732 28.987,-9.681 -10.58,-9.326 17.645,-9.151 20.62,-8.926 -32.93,-8.726 -14.244,-8.524 11.08,-8.157 15.645,-8.176 23.235,-7.826 -12.847,-7.254 -15.463,-7.229 26.93,-6.71 13.188,-5.414 -18.257,-5.059 29.038,-4.576 23.17,-4.126 10.14,-3.992 20.695,-3.876 15.92,-3.301 17.645,-3.176 27.006,-3.128 19.22,-2.926 -12.18,-2.826 13.82,-2.326 22.32,-1.921 24.67,-1.726 14.82,-0.826 25.495,-0.301 -37.08,-0.251 -11.754,-0.041 11.82,0.174 22.72,0.249 28.86,0.326 19.17,1.424 -11.754,2.525 22.645,2.574 19.895,2.974 -18.308,4.339 -11.373,5.192 -11.551,7.224 -9.18,8.174 -32.955,8.524 8.32,9.174 -11.475,9.433 -5.68,10.174 4.82,10.174 -12.288,11.389 -30.68,12.674 -25.68,12.674 -20.68,12.674 -7.18,12.674 -1.68,12.674 4.32,12.674 -13.609,15.109 -12.18,15.174 -30.68,17.674 -25.68,17.674 -20.68,17.674 23.933,19.65 21.094,20.475 12.631,20.717 28.125,21.492 24.155,21.959 19.107,22.4 -25.68,22.674 -20.68,22.674 -15.68,22.674 21.861,23.839 -20.68,27.674 -15.68,27.674 14.32,27.674 19.32,27.674 24.32,27.674 -15.68,32.674 14.32,32.674
  other v2: 15.323,4.247 10.624,4.273 23.806,4.374 26.6,4.374 10.624,5.67 15.653,6.175 25.635,6.787 24.746,7.829 27.159,7.835 11.563,8.972 27.159,9.512 24.674,9.525 25.229,10.902 11.995,11.08 25.229,11.74 11.741,12.096 26.092,12.406 27.133,12.452 10.624,12.96 15.348,13.117 17.659,13.315 13.392,13.722 7.82,14.174 21.977,14.273 20.25,15.093 21.317,15.093 22.689,15.093 23.552,15.093 24.517,15.297 17.65,16.389 12.859,16.516 10.624,16.592 26.981,16.592 14.383,17.963 17.65,18.04 20.25,18.04 21.52,18.04 26.981,18.04
  other v3: 16.85,7.375 18.05,7.375 19.25,7.375 20.45,7.375 16.85,8.575 18.05,8.575 19.25,8.575 20.45,8.575 16.85,9.775 18.05,9.775 19.25,9.775 20.45,9.775 16.85,10.975 18.05,10.975 19.25,10.975 20.45,10.975
NetC3_2: C3.2 L1.1 U1.30 | length 2.2
  Top Layer w0.229: U1.30 22.15,8.975 22.46,8.665 C3.2@22.849,8.665
  Top Layer w0.508: C3.2@22.841,8.67 L1.1@23.738,8.67
NetC22_1: C22.1 U3.4 | length 2
  Top Layer w0.3: C22.1 -16.7,12.175 -15.95,11.425 U3.4
NetC22_2: C22.2 R6.1 U3.3 | length 3.3
  Top Layer w0.3: C22.2 -16.7,13.675 -16.15,14.225 U3.3 -15.14,15.522 R6.1
NetD1_1: D1.1 R2.2 | length 35.4
  Top Layer w0.3: D1.1 -3.1,-19.076 9.57,-19.076 18.649,-9.997 R2.2
NetD2_1: D2.1 R3.2 | length 24.5
  Top Layer w0.3: D2.1 1.32,-16.826 9.07,-16.826 16.65,-9.246 R3.2
NetD3_1: D3.1 R4.2 | length 13.3
  Top Layer w0.3: D3.1 8.82,-14.826 14.65,-8.996 R4.2
NetL2_1: L2.1 L3.2 | length 1.4
  Top Layer w0.279: L3.2 16.389,14.913 L2.1
NetL2_2: L2.2 U1.47 | length 1.4
  Top Layer w0.229: L2.2 16.389,13.08 16.85,12.62 U1.47
P0.00/XL1: C11.1 U1.2 X2.1 | length 4.8
  Top Layer w0.152: X2.1 13.967,10.044 14.898,10.975 U1.2
P0.01/XL2: C12.1 U1.3 X2.2 | length 7
  Top Layer w0.152: C12.1 11.682,7.044 X2.2 11.898,7.544 14.929,10.575 U1.3
P0.02/AIN0: U1.4 | length 8
  Top Layer w0.152: 12.325,3.947 12.325,7.539 14.961,10.175 U1.4
P0.03/AIN1: U1.5 | length 7.4
  Top Layer w0.152: 12.631,3.947 12.631,7.413 14.993,9.775 U1.5
P0.04/AIN2: U1.6 | length 6.9
  Top Layer w0.152: 12.936,3.947 12.936,7.286 15.025,9.375 U1.6
P0.05/AIN3: U1.7 | length 6.3
  Top Layer w0.152: 13.244,3.947 13.244,7.159 15.059,8.975 U1.7
P0.06: U1.8 | length 5.8
  Top Layer w0.152: 13.548,3.947 13.548,7.033 15.09,8.575 U1.8
P0.07: U1.9 | length 5.3
  Top Layer w0.152: 13.853,3.947 13.853,6.907 15.121,8.175 U1.9
P0.08: U1.10 | length 4.7
  Top Layer w0.152: 14.158,3.947 14.158,6.78 15.153,7.775 U1.10
P0.09: U1.11 | length 4.2
  Top Layer w0.152: 14.463,3.947 14.463,6.654 15.184,7.375 U1.11
P0.10: U1.12 | length 3.6
  Top Layer w0.152: 14.768,3.947 14.768,6.528 15.215,6.975 U1.12
P0.11: R4.1 U1.14 | length 11.6
  Top Layer w0.152: R4.1 14.65,-3.536 16.85,-1.336 U1.14
P0.12: R3.1 U1.15 | length 11
  Top Layer w0.152: R3.1 16.65,-2.556 17.25,-1.956 U1.15
P0.13: R2.1 U1.16 | length 11.1
  Top Layer w0.152: U1.16 17.65,-1.415 18.65,-2.415 R2.1@18.65,-4.575
P0.14: U1.17 U4.12 | length 65.2
  Top Layer w0.152: U1.17 18.05,-0.326 18.694,-0.971
  Top Layer w0.26: -1.48,-31.18 -1.395,-31.095 -1.395,-30.9 U4.12
  Top Layer w0.3: v1(-6.155,-29.208) -6.155,-31.304 -3.733,-33.726 -1.929,-33.726 -1.48,-33.277 -1.48,-31.18 ; v1(-6.123,-27.276) -6.123,-25.074 -2.175,-21.126 10.797,-21.126 19.882,-12.042 19.882,-2.158 18.694,-0.971
  Bottom Layer w0.3: v1(-6.155,-29.208) -6.123,-29.176 v1(-6.123,-27.276) v1@-6.123,-27.25
P0.15: R7.1 U1.18 U4.24 | length 46.4
  Top Layer w0.152: U1.18 18.45,1.135 19.562,0.023
  Top Layer w0.26: U4.24 3.529,-28.4
  Top Layer w0.3: 3.529,-28.4 4.353,-27.576 R7.1 8.695,-27.576 21.426,-14.846 21.426,-1.841 19.562,0.023
P0.16: R5.1 U1.19 U4.23 | length 53.5
  Top Layer w0.152: U1.19 18.85,2.799 21.677,-0.028
  Top Layer w0.26: U4.23 3.466,-28.9
  Top Layer w0.3: 3.466,-28.9 4.5,-28.9 5.7,-30.1 7.238,-30.1 R5.1 11.52,-30.076 24.945,-16.651 24.945,-3.296 21.677,-0.028
P0.17: U1.20 | length 2.2
  Top Layer w0.152: 19.25,3.943 U1.20
P0.18: U1.21 | length 2.2
  Top Layer w0.152: 19.65,3.943 U1.21
P0.19: U1.22 | length 2.2
  Top Layer w0.152: 20.05,3.943 U1.22
P0.20: U1.23 | length 2.2
  Top Layer w0.152: 20.45,3.943 U1.23
P0.21: U1.24 | length 2.2
  Top Layer w0.152: 20.85,3.943 U1.24
P0.22: U1.27 | length 4.3
  Top Layer w0.152: U1.27 21.999,7.775 22.536,7.238 22.536,4.066
P0.23: U1.28 | length 4.9
  Top Layer w0.152: U1.28 22.03,8.175 22.841,7.364 22.841,3.943
P0.24: U1.29 | length 5.5
  Top Layer w0.152: U1.29 22.061,8.575 23.146,7.49 23.146,3.943
P0.25: C13.1 H2.1 U1.37 | length 15.4
  Top Layer w0.152: U1.37 20.85,12.899 C13.1@21.245,13.294 ; C13.1 C13.1@21.245,13.294 ; H2.1 25.636,22.108 24.628,21.1 22.471,21.1 20.784,19.413 20.784,13.755 C13.1@21.245,13.294
P0.26: C14.1 H2.2 U1.38 | length 13.5
  Top Layer w0.152: U1.38 20.45,12.709 20.301,12.858 C14.1 19.717,13.857 19.717,19.888 21.465,21.636 23.063,23.234 23.063,23.941 H2.2
P0.27: H2.3 U1.39 | length 12.4
  Top Layer w0.152: U1.39 20.05,12.65 19.412,13.288 19.412,20.654 20.62,21.862 H2.3@20.62,23.839
P0.28/AIN4: H2.4 U1.40 | length 12.3
  Top Layer w0.152: H2.4@18.08,23.839 18.05,23.809 18.05,21.725 19.107,20.668 19.107,13.162 19.65,12.619 U1.40
P0.29/AIN5: H2.5 U1.41 | length 13.2
  Top Layer w0.152: H2.5@15.54,23.839 15.54,23.231 18.802,19.968 18.802,13.036 19.25,12.588 U1.41
P0.30/AIN6: H2.6 U1.42 | length 15.6
  Top Layer w0.152: H2.6@13,23.839 13,22.518 14.568,20.95 17.109,20.95 18.498,19.562 18.498,12.909 18.85,12.557 U1.42
P0.31/AIN7: U1.43 U3.1 | length 44
  Top Layer w0.152: 17.95,19.574 18.193,19.331 18.193,12.783 18.45,12.526 U1.43
  Top Layer w0.3: U3.1 -13.24,14.175 -13.115,14.05 -13.065,14.05 -10.467,11.451 7.36,11.451 11.82,15.912 11.82,17.124 13.549,18.853 13.624,18.853 14.345,19.574 17.95,19.574
REGULATOR: C25.2 U4.10 | length 1.9
  Top Layer w0.26: C25.2 -2.475,-30.65 -2.325,-30.5 -2.325,-30.35 -1.875,-29.9 U4.10
RF: L1.2 pad.0 R1.1 | length 2.4
  Top Layer w0.762: L1.2@24.746,8.673 pad.0
SWDCLK: H1.3 U1.25 | length 24.8
  Top Layer w0.152: U1.25 21.675,2.477 26.045,-1.893 26.045,-13.236 H1.3@27.995,-15.186
SWDIO: H1.4 U1.26 | length 22.8
  Top Layer w0.152: U1.26 21.965,7.375 22.229,7.111 22.229,3.943 27.995,-1.824 H1.4@27.995,-12.646
TOUCHPAD: H3.1 H4.1 R6.2 | length 20.4
  Top Layer w0.6: R6.2 -10.18,17.039 ; H3.1 -9.68,16.539 -10.18,17.039 ; H4.1 -9.872,17.039 -10.18,17.039
VDD_NRF: BT1.1 C5.1 C8.1 C9.1 C16.2 C17.2 C18.2 C19.2 C23.2 C24.2 H1.1 R5.2 R7.2 U1.13 U1.36 U1.48 U2.3 U4.8 U4.13 | length 224.5
  Top Layer w0.229: v2(13.32,12.852) 13.403,12.852 13.995,12.26 14.08,12.175 U1.48@16.44,12.175 ; v2(16.262,4.273) 16.45,4.46 16.45,5.086 U1.13
  Top Layer w0.254: U1.36@21.673,11.402 21.673,11.863 22.688,12.879 C8.1@22.688,13.171 ; v2(21.977,13.188) 21.995,13.171 C8.1@22.688,13.171 ; C8.1 C8.1@22.688,13.171
  Top Layer w0.26: -1.975,-28.9 U4.8 ; C23.2 U4.13
  Top Layer w0.3: C24.2@-2.325,-28.55 -1.975,-28.9 ; 15.445,2.099 16.262,2.916 v2@16.262,4.199
  Top Layer w0.381: C9.1@13.995,12.09 C9.1@13.995,12.26
  Top Layer w0.6: -13.3,1.719 U2.3 ; -11.906,-28.626 -11.68,-28.4 -4.18,-28.4 ; C24.2 -4.18,-28.4 ; -0.55,-35.576 -0.375,-35.401 C23.2 ; 6.07,-35.576 7.261,-34.385 R5.2 ; R7.2 7.25,-26.076 5,-23.826 -2.68,-23.826 -4.18,-25.326 -4.18,-28.4
  Top Layer w1: BT1.1@-28.475,-10.972 -27.515,-10.972 BT1.1@-27.38,-11.107 ; BT1.1@-26.7,10.747 -22.272,10.747 -16.43,4.905 -16.43,-1.751 ; BT1.1@-25.74,-11.047 -22.125,-11.047 -16.43,-5.351 -16.43,-4.431 ; BT1.1@-25.605,-11.182 -25.605,-12.825 -25.605,-14.926 -11.906,-28.626 -4.955,-35.576 -0.55,-35.576 6.07,-35.576 8.82,-35.576 16.32,-28.076 23.27,-28.076 28.095,-23.251 28.095,-22.551 H1.1@28.095,-20.526 ; C19.2@-13.35,1.329 -13.35,-1.165 -13.936,-1.751 -16.43,-1.751 ; 15.42,2.074 12.02,-1.326 12.02,-5.541 6.235,-11.326 -5.741,-11.326 -11.491,-5.576 -14.18,-5.576 -15.285,-5.576 -16.43,-4.431 ; -16.43,-4.431 -16.43,-1.751
  Bottom Layer w0.254: v2(13.32,12.852) 13.644,12.528 21.317,12.528 v2(21.977,13.188)
  Bottom Layer w0.381: v2(13.32,12.852) 13.32,10.614 14.943,8.991 14.943,5.592 v2(16.262,4.273)
XC1: C1.1 U1.34 X1.1 | length 8
  Top Layer w0.152: U1.34 21.999,10.575 22.533,11.109 22.533,11.778 23.106,12.35 25.101,12.35 25.355,12.604 25.355,13.722 25.906,14.273 C1.1
XC2: C2.1 U1.35 X1.3 | length 4.7
  Top Layer w0.152: U1.35 21.965,10.975 22.229,11.239 22.229,11.908 22.976,12.655 23.4,12.655 23.577,12.832 C2.1@23.577,13.265 ; C2.1@23.527,13.273 24.483,13.273 X1.3@24.683,13.073
pads on no net: U1.44 U4.1 U4.2 U4.3 U4.4 U4.5 U4.6 U4.7 U4.11 U4.14 U4.15 U4.16 U4.17 U4.19 U4.21 U4.22

## Polygon pours and split planes (outlines as drawn)
GND on Bottom Layer "GND_L02_P1007" (solid, remove dead copper, pour order 1007): 0,-38 cw(c0,0) -38,0 cw(c0,0) 0,38 cw(c0,0) 38,0 cw(c0,0)
GND on Top Layer "GND_L01_P1008" (solid, remove dead copper, pour order 1008): 0,-38 cw(c0,0) -38,0 cw(c0,0) 0,38 cw(c0,0) 38,0 cw(c0,0)

## Keep-outs
Keep-Out Layer:
  circle w0.198: c0,0 r38
  circle w0.198: c0,0 r10.269

## Other copper
Top Layer:
  rectangle net ANT: 34.723,-9.394 35.993,-8.632
  pour cut-out: -11.68,31.174 cw(c-5.513,31.174) -5.513,37.341 4.153,37.341 cw(c4.153,31.174) 10.32,31.174 10.32,21.174 cw(c4.32,21.174) 4.32,15.174 -5.68,15.174 cw(c-5.68,21.174) -11.68,21.174
  pour cut-out: -16.18,18.174 -16.18,16.174 -11.68,16.174 -11.18,15.674 -11.18,13.674 -10.68,13.174 -8.68,13.174 -8.18,13.674 -8.18,16.674 -9.68,18.174
  pour cut-out: -18.511,18.487
  pour cut-out: -16.68,15.174
  pour cut-out: -16.68,15.174
  pour cut-out: 29.727,29.415 29.727,-30.585 45.616,-30.585 45.616,29.415
  pour cut-out: 24.365,7.575 21.622,7.575 21.622,10.47 24.365,10.47
Bottom Layer:
  pour cut-out: -11.68,31.174 cw(c-5.513,31.174) -5.513,37.341 4.153,37.341 cw(c4.153,31.174) 10.32,31.174 10.32,21.174 cw(c4.32,21.174) 4.32,15.174 -5.68,15.174 cw(c-5.68,21.174) -11.68,21.174
  pour cut-out: -16.18,18.174 -16.18,16.174 -11.68,16.174 -11.18,15.674 -11.18,13.674 -10.68,13.174 -8.68,13.174 -8.18,13.674 -8.18,16.674 -9.68,18.174
  pour cut-out: 29.727,29.415 29.727,-30.585 45.616,-30.585 45.616,29.415

## Silkscreen, mask and mechanical layers (free items; w line width, h text height)
Top Overlay:
  text "30" at 13.281,25.575 h0.8 r90
  text "29" at 15.804,25.5 h0.8 r90
  text "26" at 23.475,25.5 h0.8 r90
  text "28" at 18.403,25.45 h0.8 r90
  text "27" at 20.821,25.45 h0.8 r90
  text "25" at 26.086,25.45 h0.8 r90
  text "TOUCHPAD" at -12.175,22.925 h0.8 r90
  text "JLCJLCJLCJLC" at -17.83,-3.001 h0.5 r90
  text "MOTION" at -1.973,-15.526 h0.8 r90
  text "CONNECTION" at -8.552,-15.577 h0.8 r90
  text "TOUCH" at 5.418,-15.577 h0.8 r90
Fab Notes:
  text "CUTOUT" at -5.4,-0.875 h2